# EAGLE board blmc (EAGLE 4.15)
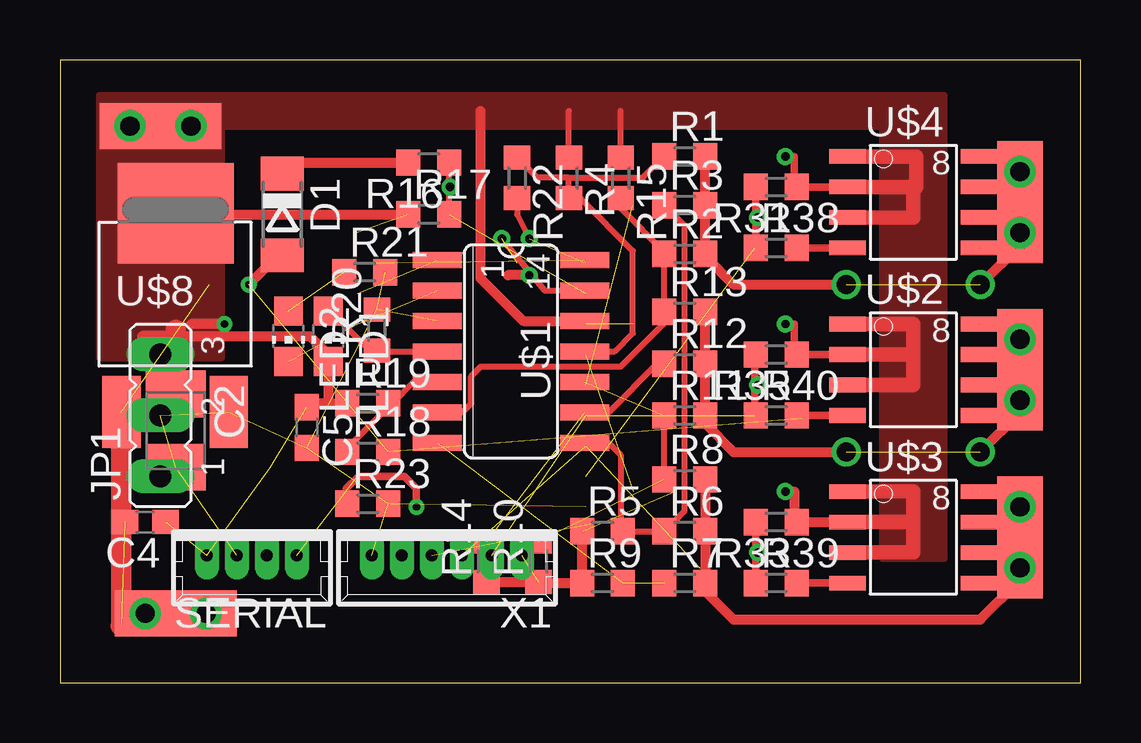
[diagram p0: board, top side]
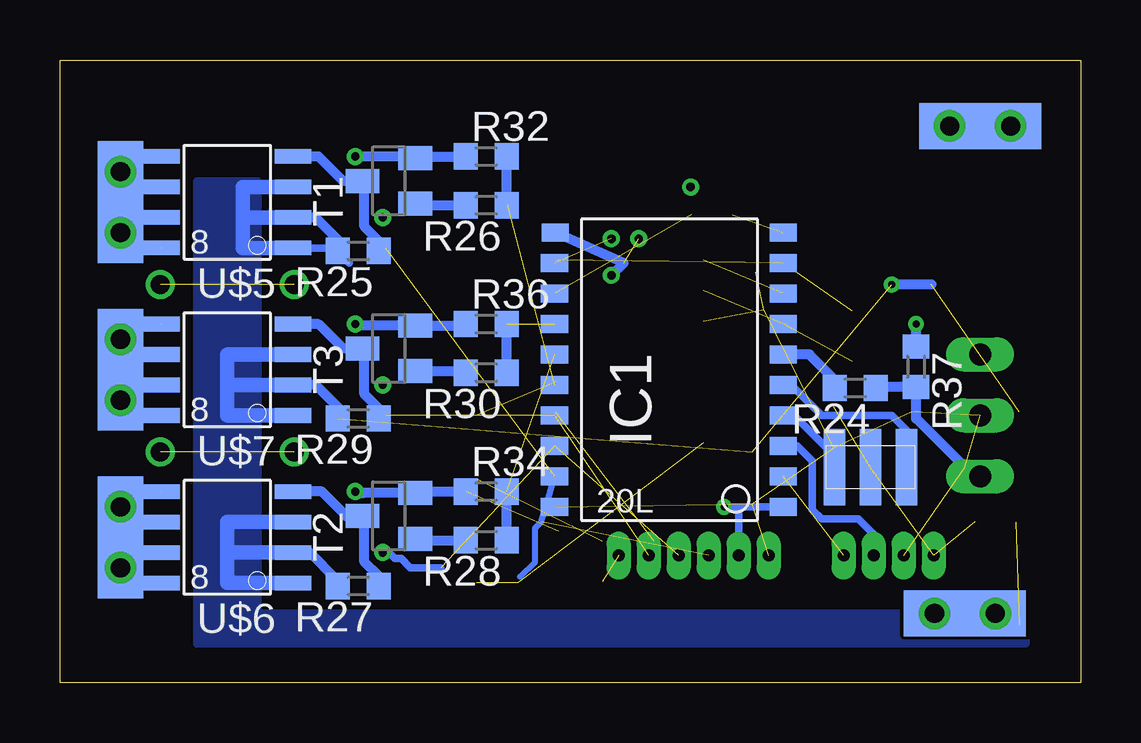
[diagram p1: board, bottom side, seen from below]

Size 42.53 x 25.96 mm. Coordinates in mm from the lower left corner, seen from the top.
Outline: 0,0 42.53,0 42.53,25.96 0,25.96 0,0
Copper layers (1*2+15*16): Top 0.035mm / dielectric 0.2mm / Route2 0.035mm / dielectric 1.5mm / Route15 0.035mm / dielectric 0.2mm / Bottom 0.035mm
Design rules "eurocircuits_verified_4l": minimum track width 0.15mm, minimum drill 0.35mm, track to track 0.15mm, track to pad 0.15mm, pad to pad 0.15mm, via to via 0.15mm, smd to smd 0.15mm, copper to edge 20mil, drill to drill 8mil, minimum pad ring 10mil, minimum via ring 7mil, stop-mask expansion 4mil, vias tented up to drill 0mil, thermal gap 10mil

## Footprints (pad centres in the part's own frame; a part is rotated, then mirrored left to right if it is on the bottom)
B/3528-21R = smd 1.95 x 2.5: + 1.525,0; - -1.525,0
C0603 = smd 1.1 x 1: 1 -0.85,0; 2 0.85,0
SOD80C = smd 1.4 x 1.8: A 1.7,0; C -1.7,0
SO-20L = smd 0.762 x 1.143: 1 -5.08,-5.131; 2 -3.81,-5.131; 3 -2.54,-5.131; 4 -1.27,-5.131; 5 0,-5.131; 6 1.27,-5.131; 7 2.54,-5.131; 8 3.81,-5.131; 9 5.08,-5.131; 10 6.35,-5.131; 11 6.35,4.369; 12 5.08,4.394; 13 3.81,4.394; 14 2.54,4.394; 15 1.27,4.394; 16 0,4.394; 17 -1.27,4.394; 18 -2.54,4.394; 19 -3.81,4.394; 20 -5.08,4.394
JP2 = drill 0.914 long: 1 -2.54,0; 2 0,0; 3 2.54,0
CHIP-LED0805 = smd 1.2 x 1.2: A 0,-1.05; C 0,1.05
R0603 = smd 1 x 1.1: 1 -0.85,0; 2 0.85,0
53047-04 = drill 0.5 pad 0.698 long: 1 1.875,0; 2 0.625,0; 3 -0.625,0; 4 -1.875,0
SOT23 = smd 1 x 1.4: 1 -0.95,-1.1; 2 0.95,-1.1; 3 0,1.1
SO-14 = smd 0.66 x 2.032: 1 -2.54,-3.073; 2 -1.27,-3.073; 3 0,-3.073; 4 1.27,-3.073; 5 2.54,-3.073; 6 3.81,-3.073; 7 5.08,-3.073; 8 5.08,3.073; 9 3.81,3.073; 10 2.54,3.073; 11 1.27,3.073; 12 0,3.073; 13 -1.27,3.073; 14 -2.54,3.073
SO-8 = smd 1.524 x 0.61: 1 -2.743,1.27; 2 -2.743,0; 3 -2.743,-1.27; 4 -2.743,-2.54; 5 2.743,-2.54; 6 2.743,-1.27; 7 2.743,0; 8 2.743,1.27
TO252 = smd 1.6 x 2.997: 1 -2.261,-6.198; 3 2.21,-6.198 | smd 4.826 x 4.191: 4 0,2.083
MICRO_CRYSTAL = smd 0.9 x 3.2: P$1 -1.5,0; P$2 0,0; P$3 1.5,0
SOLD_PAD_1 = smd 1.905 x 5.08: P$1 0,0 | smd 1.905 x 5.08 bottom: P$2 0,0 | drill 0.8 round: P$3 0,1.27; P$4 0,-1.27
53047-06 = drill 0.5 pad 0.698 long: 1 3.125,0; 2 1.875,0; 3 0.625,0; 4 -0.625,0; 5 -1.875,0; 6 -3.125,0

## Placement (x,y rotation side)
C2  [B/3528-21R]  4.82,10.5 270 top
C4  100nF  [C0603]  3.55,6.69 180 top
C5  100nF  [C0603]  10.28,10.63 270 top
D1  [SOD80C]  9.27,19.52 270 top
IC1  AT90S2313S  [SO-20L]  17.52,12.41 90 bottom
JP1  [JP2]  4.19,11.14 90 top
LED1  [CHIP-LED0805]  11.17,14.44 180 top
LED2  [CHIP-LED0805]  9.52,14.44 180 top
R1  10k  [R0603]  26.03,21.93 0 top
R2  20k  [R0603]  26.03,17.87 0 top
R3  20k  [R0603]  26.03,19.9 0 top
R4  2k2  [R0603]  21.2,21.04 270 top
R5  2k2  [R0603]  22.6,6.31 0 top
R6  20k  [R0603]  26.03,6.31 0 top
R7  10k  [R0603]  26.03,4.15 0 top
R8  20k  [R0603]  26.03,8.47 0 top
R9  2k2  [R0603]  22.6,4.15 0 top
R10  2k2  [R0603]  19.93,5.04 90 top
R11  20k  [R0603]  26.03,11.14 0 top
R12  10k  [R0603]  26.03,13.3 0 top
R13  20k  [R0603]  26.03,15.46 0 top
R14  2k2  [R0603]  17.78,5.04 90 top
R15  2k2  [R0603]  23.36,21.04 270 top
R16  20k  [R0603]  15.36,21.68 180 top
R17  2k2  [R0603]  15.36,19.52 0 top
R18  20k  [R0603]  12.82,9.61 0 top
R19  10k  [R0603]  12.82,11.65 0 top
R20  2k2  [R0603]  13.2,14.69 90 top
R21  2k2  [R0603]  12.7,17.11 0 top
R22  10k  [R0603]  19.04,21.04 270 top
R23  10k  [R0603]  12.82,7.46 0 top
R24  10k  [R0603]  9.39,12.28 180 bottom
R25  680R  [R0603]  30.09,18 180 bottom
R26  10k  [R0603]  24.76,19.9 180 bottom
R27  680R  [R0603]  30.09,4.03 180 bottom
R28  10k  [R0603]  24.76,5.93 180 bottom
R29  680R  [R0603]  30.09,11.01 180 bottom
R30  10k  [R0603]  24.76,12.92 180 bottom
R31  47k  [R0603]  29.84,20.66 180 top
R32  47k  [R0603]  24.76,21.93 0 bottom
R33  47k  [R0603]  29.84,6.69 180 top
R34  47k  [R0603]  24.76,7.96 0 bottom
R35  47k  [R0603]  29.84,13.68 180 top
R36  47k  [R0603]  24.76,14.95 0 bottom
R37  47k  [R0603]  6.85,13.17 270 bottom
R38  100R  [R0603]  29.84,18.12 0 top
R39  100R  [R0603]  29.84,4.15 0 top
R40  100R  [R0603]  29.84,11.14 0 top
SERIAL  [53047-04]  8,5.3 180 top
T1  BC847  [SOT23]  28.82,20.92 90 bottom
T2  BC847  [SOT23]  28.82,6.95 90 bottom
T3  BC847  [SOT23]  28.82,13.93 90 bottom
U$1  LM339SO  [SO-14]  18.79,15.08 270 top
U$2  SI4420N  [SO-8]  35.56,13.68 0 top
U$3  SI4420N  [SO-8]  35.56,6.69 0 top
U$4  SI4420N  [SO-8]  35.56,20.66 0 top
U$5  SI4425P  [SO-8]  35.56,19.39 180 bottom
U$6  SI4425P  [SO-8]  35.56,5.42 180 bottom
U$7  SI4425P  [SO-8]  35.56,12.41 180 bottom
U$8  L4941SMD  [TO252]  4.82,17.49 0 top
U$9  MICRO_RESO  [MICRO_CRYSTAL]  8.76,8.98 180 bottom
U$10  SOLDER_PAD100_75  [SOLD_PAD_1]  40,20.03 0 top
U$11  SOLDER_PAD100_75  [SOLD_PAD_1]  40,6.06 0 top
U$14  SOLDER_PAD100_75  [SOLD_PAD_1]  40,13.04 0 top
X1  [53047-06]  16.12,5.3 180 top
X4  SOLDER_PAD100_75  [SOLD_PAD_1]  4.82,2.88 90 top
X5  SOLDER_PAD100_75  [SOLD_PAD_1]  4.19,23.2 90 top

## Library data of the parts
C2 C4 C5 R1-R40 = rcl
D1 = diode
IC1 = atmel
JP1 = jumper
LED1 LED2 = led
SERIAL X1 = con-molex
T1-T3 = transistor-npn
U$1-U$8 = bko
U$9-U$11 U$14 X4 X5 = paparazzi

## Nets
+5V: C2.+ C5.2 IC1.20 JP1.2 R20.2 R21.2 R23.2 SERIAL.2 U$1.3 U$8.3 X1.1
+UB: C4.2 D1.A R18.2 R25.2 R27.2 R29.2 U$5.1 U$6.1 U$7.1 U$8.1 X4.P$1
GND: C2.- C4.1 C5.1 IC1.10 JP1.3 LED1.C R4.1 R5.1 R9.1 R10.1 R14.1 R15.1 R17.1 R19.1 R31.1 R32.1 R33.1 R34.1 R35.1 R36.1 R37.1 SERIAL.1 T1.2 T2.2 T3.2 U$1.12 U$2.1 U$3.1 U$4.1 U$8.4 U$9.P$2 X1.6 X5.P$1
N$1: R1.2 R2.2 R3.2 U$4.5 U$4.6 U$4.7 U$4.8 U$5.5 U$5.6 U$5.7 U$5.8 U$10.P$1
N$2: R2.1 R13.1 R15.2 U$1.6
N$3: R1.1 R4.2 R22.1 U$1.11
N$4: R6.2 R7.2 R8.2 U$3.5 U$3.6 U$3.7 U$3.8 U$6.5 U$6.6 U$6.7 U$6.8 U$11.P$1
N$5: R38.2 U$4.4
N$6: IC1.3 SERIAL.3
N$7: IC1.16 R26.1 R32.2
N$8: R39.2 U$3.4
N$9: R40.2 U$2.4
N$10: R3.1 R5.2 R6.1 U$1.8
N$11: IC1.15 R28.1 R34.2
N$12: R7.1 R9.2 U$1.7
N$13: R8.1 R10.2 R11.1 U$1.10
N$14: IC1.14 R30.1 R36.2
N$15: R12.1 R14.2 U$1.9
N$16: IC1.8 U$1.1
N$17: IC1.7 LED2.C U$1.2
N$18: IC1.9 U$1.14
N$19: IC1.11 U$1.13
N$20: IC1.1 R23.1 X1.2
N$21: LED2.A R21.1
N$22: JP1.1 R24.1 R37.2
N$23: R18.1 R19.2 U$1.5
N$24: R27.1 T2.3 U$6.4
N$25: LED1.A R20.1 U$1.4
N$26: IC1.6 R24.2
N$27: IC1.5 U$9.P$1
N$28: IC1.4 U$9.P$3
N$29: D1.C R16.2
N$30: IC1.13 R16.1 R17.2
N$31: IC1.19 R31.2 R38.1 X1.3
N$32: IC1.2 SERIAL.4
N$33: IC1.12 R22.2
N$34: R25.1 T1.3 U$5.4
N$36: IC1.18 R33.2 R39.1 X1.4
N$39: R29.1 T3.3 U$7.4
N$40: IC1.17 R35.2 R40.1 X1.5
N$43: R11.2 R12.2 R13.2 U$2.5 U$2.6 U$2.7 U$2.8 U$7.5 U$7.6 U$7.7 U$7.8 U$14.P$1
N$46: R30.2 T3.1
N$47: R28.2 T2.1
N$48: R26.2 T1.1

## Tracks (layer width: path | path; a pad name or v marks a point on that pad's centre or on a via)
+5V  (10 unrouted)
+UB  (via drill 0.3)  (4 unrouted)
  Top 0.406: D1.A 9.09,17.82 v7.87,16.6
  Top 0.864: U$8.1 2.56,2.4 2.54,2.38 4.31,2.38 X4.P$1
  Bottom 0.305: U$5.1 31.11,18.12 30.48,17.49
  Bottom 0.406: 32.38,5.42 32.13,5.42 30.94,4.24 R27.2 | 32.38,12.41 31.87,12.41 30.94,11.48 R29.2 | R25.2 30.82,18.34 31.87,19.39 33.02,19.39 | 6.22,16.6 v7.87,16.6
  Bottom 0.61: U$5.1 34.92,18.12 34.92,19.39 | 33.02,19.39 34.92,19.39 | 34.92,19.39 34.92,20.66 33.02,20.66 | U$7.1 35.56,11.14 35.56,12.41 | 32.38,12.41 35.56,12.41 | 35.56,12.41 35.56,13.68 32.38,13.68 | U$6.1 35.56,4.15 35.56,5.42 | 32.38,5.42 35.56,5.42 | 35.56,5.42 35.56,6.69 32.38,6.69
  pour Bottom (no thermals): 34.28,20.92 36.83,20.92 36.83,1.61 2.28,1.61 2.28,4.15 6.73,4.15 6.73,2.88 34.28,2.88
GND  (via drill 0.3, 0.35)  (6 unrouted)
  Top 0.254: R4.1 21.2,23.84 | R15.1 23.36,23.84
  Top 0.305: 32.38,13.68 R35.1 30.6,13.68 30.6,14.95 v30.22,14.95 | 30.6,6.69 R33.1 | 32.38,20.66 R31.1 30.6,20.66 30.6,21.93 v30.22,21.93
  Top 0.406: R33.1 32.38,6.69 | 30.6,6.69 30.6,7.96 v30.22,7.96 | R5.1 21.75,4.19 21.71,4.15 R9.1 19.93,4.15 R10.1 17.81,4.19 17.78,4.15 R14.1 | C5.1 10.45,11.65 11.17,11.65 | 11.17,11.65 R19.1 | 11.17,11.65 LED1.C 11.17,13.68 10.41,14.44 4.82,14.44 3.42,14.44 | U$8.4 4.82,19.52 R17.1 | 17.52,23.84 17.52,16.85 19.3,15.08 U$1.12 | v6.85,14.95 5.46,14.95
  Top 0.61: U$4.1 35.68,21.93 35.68,20.66 35.56,20.66 | 32.38,20.66 35.56,20.66 | 35.56,20.66 35.56,19.39 32.38,19.39 | U$2.1 35.56,14.95 35.56,13.68 | 32.38,13.68 35.56,13.68 | 35.56,13.68 35.56,12.41 32.38,12.41 | U$3.1 35.56,7.96 35.56,6.69 | 32.38,6.69 35.56,6.69 | 35.56,6.69 35.56,5.42 32.38,5.42
  Top 0.864: 4.82,14.69 4.82,14.44 C2.-
  Bottom 0.406: v30.22,7.96 29.9,7.9 T2.2 27.72,7.92 27.68,7.96 R34.1 | R36.1 25.65,14.95 25.71,14.88 T3.2 30.16,14.88 v30.22,14.95 | 27.68,21.93 R32.1 | T1.2 27.72,21.89 27.68,21.93 | 27.68,21.93 v30.22,21.93 | R37.1 v6.85,14.95
  pour Top (no thermals): 34.28,5.17 34.28,23.2 6.73,23.2 6.73,13.55 1.65,13.55 1.65,24.47 36.83,24.47 36.83,5.17
N$1  (via drill 0.8)  (2 unrouted)
  Top 0.406: v32.76,16.6 28.06,16.6 26.88,17.78 R2.2 26.92,17.87 26.88,17.91 R3.2 26.92,19.9 26.88,19.94 R1.2 | v38.35,16.6 40,18.25 U$10.P$1
  Top 0.61: U$5.5 40,21.93 U$10.P$1 | U$5.6 40,20.66 U$10.P$1 | 40,19.39 U$4.6 | U$10.P$1 40,19.39 | U$4.5 40,18.12 40,19.39
  Bottom 0.61: U$5.5 40.64,21.93 40.64,20.66 | 40.64,20.66 U$5.6 | U$4.6 40.64,19.39 | 40.64,19.39 40.64,20.66 | U$4.5 40.64,18.12 40.64,19.39
N$2
  Top 0.254: R15.2 23.36,19.77 25.18,17.96 R2.1 25.18,15.5 25.14,15.46 | 25.14,15.46 R13.1 | 25.14,15.46 25.14,14.95 23.36,13.17 17.52,13.17 17.14,12.79 17.14,11.65 16.76,11.27 U$1.6
N$3
  Top 0.254: R22.1 19.89,21.04 21.2,21.04 | 21.2,21.04 22.47,21.04 | 22.47,21.04 22.6,21.04 | R1.1 24.29,21.04 22.47,21.04 | 21.2,21.04 R4.2 21.67,20.19 23.87,18 23.87,14.57 23.11,13.8 U$1.11
N$4  (1 unrouted)
  Top 0.406: 40,4.15 40,4.28 38.35,2.63 28.06,2.63 26.88,3.81 R7.2 26.92,4.15 R6.2 26.92,6.31 R8.2
  Top 0.61: U$6.5 40.64,7.96 U$11.P$1 | U$6.6 40.64,6.69 U$11.P$1 | U$3.6 40.64,5.42 U$11.P$1 | U$3.5 40,4.15 40.64,4.15 U$11.P$1
  Bottom 0.61: U$6.5 40.64,7.96 40.64,6.06 | U$6.6 40.64,6.69 40.64,6.06 | U$3.6 40.64,5.42 40.64,6.06 | U$3.5 40.64,4.15 40.64,6.06
N$5
  Top 0.305: 30.48,18.12 R38.2 U$4.4
N$6
  Bottom 0.305: SERIAL.3 8.62,6.18 9.27,6.82 10.79,6.82 11.17,7.2 11.17,9.23 11.81,9.87 IC1.3 12.44,9.87
N$7  (1 unrouted)
  Bottom 0.406: R26.1 23.87,19.9 23.91,19.94 R32.2
N$8
  Top 0.305: 30.6,4.15 R39.2 U$3.4
N$9
  Top 0.305: 30.48,11.14 R40.2 U$2.4
N$10
  Top 0.254: R3.1 26.03,19.05 26.03,7.16 R6.1 R5.2 23.36,6.31 23.36,9.49 22.86,10 U$1.8
N$11  (1 unrouted)
  Bottom 0.406: R28.1 23.87,5.93 23.91,5.97 R34.2
N$12  (2 unrouted)
N$13  (2 unrouted)
  Top 0.254: R8.1 25.14,8.47 25.18,8.51 R11.1
N$14  (1 unrouted)
  Bottom 0.406: R30.1 23.91,13 23.87,13.04 23.91,13.08 R36.2
N$15  (1 unrouted)
  Top 0.254: R12.1 24.89,13.3 22.86,11.27 U$1.9 21.84,11.27
N$16  (1 unrouted)
N$17  (2 unrouted)
N$18  (1 unrouted)
N$19  (via drill 0.35)  (1 unrouted)
  Top 0.254: U$1.13 20.19,16.34 v18.41,18.5
  Top 0.406: v19.55,16.98 18.66,16.98
  Bottom 0.406: IC1.11 19.04,17.49 v19.55,16.98
N$20  (via drill 0.3)
  Top 0.305: v14.85,7.33 14.85,8.09 14.35,8.6 12.44,8.6 11.93,8.09 11.93,7.33 11.97,7.37 R23.1
  Bottom 0.305: 14.22,7.33 v14.85,7.33 | 14.22,7.33 IC1.1 | X1.2 14.25,7.3 14.22,7.33
N$21  (1 unrouted)
N$22
  Bottom 0.406: R24.1 8.63,12.28 8.59,12.32 R37.2 6.85,11.01 4.44,8.6 JP1.1
N$23
  Top 0.254: R18.1 11.97,9.78 13.67,11.48 R19.2 13.84,11.65 14.73,12.54 U$1.5
N$24
  Bottom 0.406: U$6.4 31.62,7.96 30.6,6.95 T2.3 29.92,6.9 29.84,6.82 29.84,5.04 29.24,4.45 R27.1
N$25
  Top 0.254: LED1.A 11.26,15.49 12.91,13.84 R20.1 13.2,13.8 U$1.4
N$26
  Bottom 0.406: R24.2 10.24,12.62 11.3,13.68 IC1.6 12.44,13.68
N$27
  Bottom 0.305: U$9.P$1 7.26,10.53 7.87,11.14 10.79,11.14 12.06,12.41 IC1.5
N$28
  Bottom 0.305: IC1.4 11.93,11.14 10.26,9.46 U$9.P$3
N$29
  Top 0.406: D1.C 9.73,21.68 R16.2
N$30  (via drill 0.35)  (1 unrouted)
  Top 0.254: R16.1 16.21,20.7 v16.25,20.66 16.21,20.62 R17.2
N$31  (via drill 0.35)  (2 unrouted)
  Top 0.305: 28.95,18.12 R38.1 28.99,19.3 v29.08,19.39 28.99,19.39 R31.2
  Bottom 0.254: IC1.19 22.47,6.69 22.73,6.44 22.73,5.04 23.36,4.41
N$32  (1 unrouted)
N$33  (via drill 0.35)  (1 unrouted)
  Top 0.254: R22.2 19.04,19.52 v19.55,18.5
N$34
  Bottom 0.406: R25.1 29.24,18.42 29.84,19.01 29.84,20.92 T1.3 30.73,20.92 31.75,21.93 U$5.4
N$36  (via drill 0.35)  (2 unrouted)
  Top 0.305: 28.95,4.15 R39.1 28.99,5.42 | 28.99,5.42 R33.2 | v29.08,5.42 28.99,5.42
  Bottom 0.305: v29.08,5.42 28.82,5.42 28.57,5.17 28.32,5.17 27.93,4.79 26.67,4.79
N$39
  Bottom 0.406: U$7.4 31.75,14.95 30.73,13.93 T3.3 29.84,13.93 29.84,12.03 29.24,11.43 R29.1
N$40  (via drill 0.35)  (2 unrouted)
  Top 0.305: R40.1 28.95,11.14 28.95,12.41 | 28.99,12.41 v29.08,12.41 28.95,12.41 | R35.2 28.95,13.68 28.95,12.41
N$43  (via drill 0.8)  (2 unrouted)
  Top 0.305: R12.2 26.79,13.3
  Top 0.406: v32.76,9.61 28.06,9.61 26.88,10.8 R11.2 26.92,11.14 26.88,11.18 R12.2 26.92,13.3 26.88,13.34 R13.2 | v38.35,9.61 40,11.27
  Top 0.61: U$7.5 40,14.95 U$14.P$1 | U$7.6 40,13.68 U$14.P$1 | U$2.6 40,12.41 U$14.P$1 | U$2.5 40,11.14 40,11.27 U$14.P$1
  Bottom 0.61: U$7.5 40.64,14.95 40.64,13.04 | U$7.6 40.64,13.68 40.64,13.04 | U$2.6 40.64,12.41 40.64,13.04 | U$2.5 40.64,11.14 40.64,13.04
N$46
  Bottom 0.406: R30.2 25.65,12.92 25.71,12.98 T3.1
N$47
  Bottom 0.406: T2.1 27.72,5.97 27.68,5.93 R28.2
N$48
  Bottom 0.406: T1.1 27.72,19.94 27.68,19.9 R26.2